# Altium PCB S7CAS-PLEIADES-CARTE-MERE_P06.PcbDoc (part 2 of 3)
Units mil, origin at the board's own origin, x right, y up, seen from the top; angles counter-clockwise.
Board outline 5000 x 5000 mil, 12 copper layers (Top Layer, GND1, SIG1, GND2, PWR1, GND3, GND4, PWR2, GND5, SIG2, GND6, Bottom), stack 47.089 mil thick; 447 components, 336 nets, 2150 pads, 232 vias.
Unrouted connection lines stored in the file: 1376.
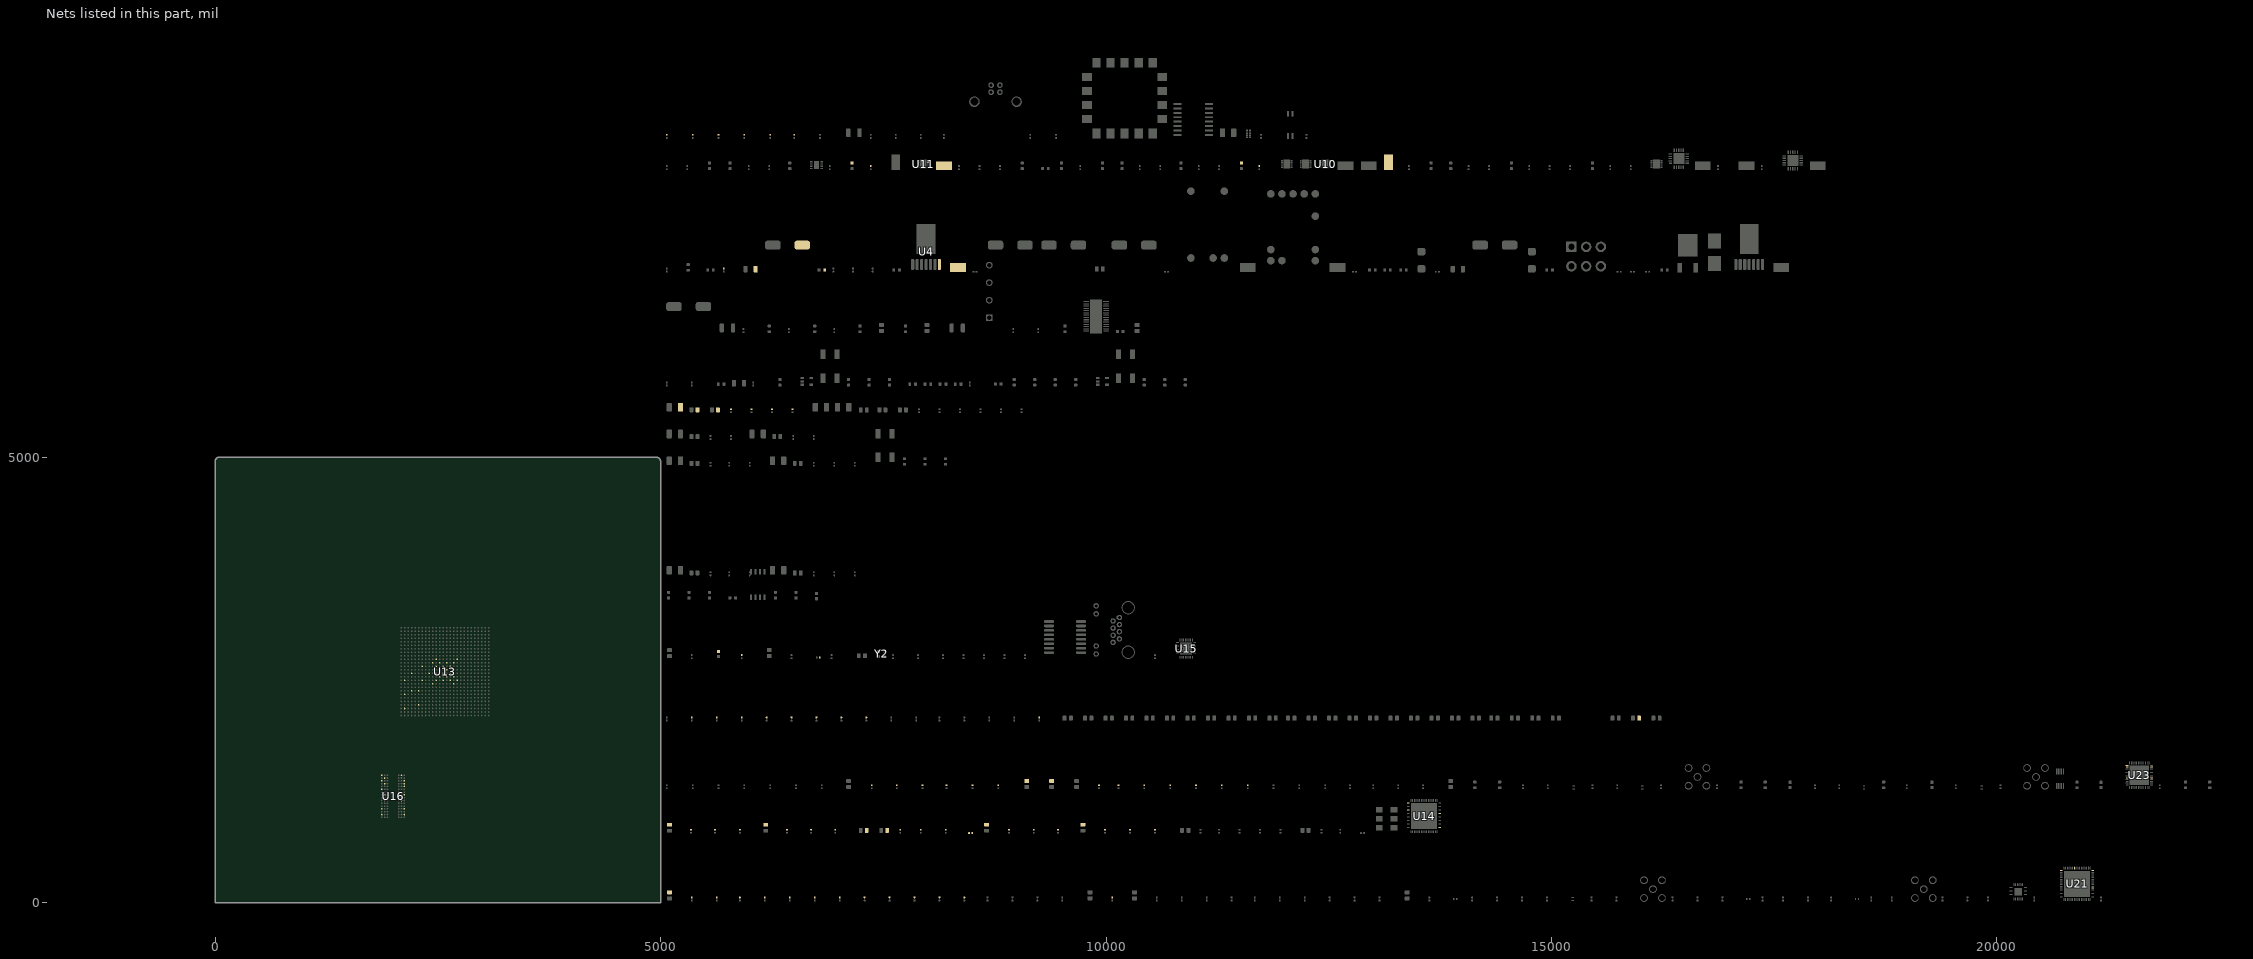
[diagram p10: the nets of this part, all layers, seen from the top]

## Footprints (in the part's own frame and the unit in brackets; to place one, negate y for a bottom-side part, rotate by r counter-clockwise, add the part's x,y. Pads: shape width x height; smd on the part's side, far side on the other; paste and mask are expansions set on the pad) (continued)
FPGA_XILINX_FGG676 [mm]
  round 0.45 smd mask+0.05: A1(-12.5,12.5) A2(-11.5,12.5) A3(-10.5,12.5) A4(-9.5,12.5) A5(-8.5,12.5) A6(-7.5,12.5) A7(-6.5,12.5) A8(-5.5,12.5) A9(-4.5,12.5) A10(-3.5,12.5) A11(-2.5,12.5) A12(-1.5,12.5) A13(-0.5,12.5) A14(0.5,12.5) A15(1.5,12.5) A16(2.5,12.5) A17(3.5,12.5) A18(4.5,12.5) A19(5.5,12.5) A20(6.5,12.5) A21(7.5,12.5) A22(8.5,12.5) A23(9.5,12.5) A24(10.5,12.5) A25(11.5,12.5) A26(12.5,12.5) AA1(-12.5,-7.5) AA2(-11.5,-7.5) AA3(-10.5,-7.5) AA4(-9.5,-7.5) AA5(-8.5,-7.5) AA6(-7.5,-7.5) AA7(-6.5,-7.5) AA8(-5.5,-7.5) AA9(-4.5,-7.5) AA10(-3.5,-7.5) AA11(-2.5,-7.5) AA12(-1.5,-7.5) AA13(-0.5,-7.5) AA14(0.5,-7.5) AA15(1.5,-7.5) AA16(2.5,-7.5) AA17(3.5,-7.5) AA18(4.5,-7.5) AA19(5.5,-7.5) AA20(6.5,-7.5) AA21(7.5,-7.5) AA22(8.5,-7.5) AA23(9.5,-7.5) AA24(10.5,-7.5) AA25(11.5,-7.5) AA26(12.5,-7.5) AB1(-12.5,-8.5) AB2(-11.5,-8.5) AB3(-10.5,-8.5) AB4(-9.5,-8.5) AB5(-8.5,-8.5) AB6(-7.5,-8.5) AB7(-6.5,-8.5) AB8(-5.5,-8.5) AB9(-4.5,-8.5) AB10(-3.5,-8.5) AB11(-2.5,-8.5) AB12(-1.5,-8.5) AB13(-0.5,-8.5) AB14(0.5,-8.5) AB15(1.5,-8.5) AB16(2.5,-8.5) AB17(3.5,-8.5) AB18(4.5,-8.5) AB19(5.5,-8.5) AB20(6.5,-8.5) AB21(7.5,-8.5) AB22(8.5,-8.5) AB23(9.5,-8.5) AB24(10.5,-8.5) AB25(11.5,-8.5) AB26(12.5,-8.5) AC1(-12.5,-9.5) AC2(-11.5,-9.5) AC3(-10.5,-9.5) AC4(-9.5,-9.5) AC5(-8.5,-9.5) AC6(-7.5,-9.5) AC7(-6.5,-9.5) AC8(-5.5,-9.5) AC9(-4.5,-9.5) AC10(-3.5,-9.5) AC11(-2.5,-9.5) AC12(-1.5,-9.5) AC13(-0.5,-9.5) AC14(0.5,-9.5) AC15(1.5,-9.5) AC16(2.5,-9.5) AC17(3.5,-9.5) AC18(4.5,-9.5) AC19(5.5,-9.5) AC20(6.5,-9.5) AC21(7.5,-9.5) AC22(8.5,-9.5) AC23(9.5,-9.5) AC24(10.5,-9.5) AC25(11.5,-9.5) AC26(12.5,-9.5) AD1(-12.5,-10.5) AD2(-11.5,-10.5) AD3(-10.5,-10.5) AD4(-9.5,-10.5) AD5(-8.5,-10.5) AD6(-7.5,-10.5) AD7(-6.5,-10.5) AD8(-5.5,-10.5) AD9(-4.5,-10.5) AD10(-3.5,-10.5) AD11(-2.5,-10.5) AD12(-1.5,-10.5) AD13(-0.5,-10.5) AD14(0.5,-10.5) AD15(1.5,-10.5) AD16(2.5,-10.5) AD17(3.5,-10.5) AD18(4.5,-10.5) AD19(5.5,-10.5) AD20(6.5,-10.5) AD21(7.5,-10.5) AD22(8.5,-10.5) AD23(9.5,-10.5) AD24(10.5,-10.5) AD25(11.5,-10.5) AD26(12.5,-10.5) AE1(-12.5,-11.5) AE2(-11.5,-11.5) AE3(-10.5,-11.5) AE4(-9.5,-11.5) AE5(-8.5,-11.5) AE6(-7.5,-11.5) AE7(-6.5,-11.5) AE8(-5.5,-11.5) AE9(-4.5,-11.5) AE10(-3.5,-11.5) AE11(-2.5,-11.5) AE12(-1.5,-11.5) AE13(-0.5,-11.5) AE14(0.5,-11.5) AE15(1.5,-11.5) AE16(2.5,-11.5) AE17(3.5,-11.5) AE18(4.5,-11.5) AE19(5.5,-11.5) AE20(6.5,-11.5) AE21(7.5,-11.5) AE22(8.5,-11.5) AE23(9.5,-11.5) AE24(10.5,-11.5) AE25(11.5,-11.5) AE26(12.5,-11.5) AF1(-12.5,-12.5) AF2(-11.5,-12.5) AF3(-10.5,-12.5) AF4(-9.5,-12.5) AF5(-8.5,-12.5) AF6(-7.5,-12.5) AF7(-6.5,-12.5) AF8(-5.5,-12.5) AF9(-4.5,-12.5) AF10(-3.5,-12.5) AF11(-2.5,-12.5) AF12(-1.5,-12.5) AF13(-0.5,-12.5) AF14(0.5,-12.5) AF15(1.5,-12.5) AF16(2.5,-12.5) AF17(3.5,-12.5) AF18(4.5,-12.5) AF19(5.5,-12.5) AF20(6.5,-12.5) AF21(7.5,-12.5) AF22(8.5,-12.5) AF23(9.5,-12.5) AF24(10.5,-12.5) AF25(11.5,-12.5) AF26(12.5,-12.5) B1(-12.5,11.5) B2(-11.5,11.5) B3(-10.5,11.5) B4(-9.5,11.5) B5(-8.5,11.5) B6(-7.5,11.5) B7(-6.5,11.5) B8(-5.5,11.5) B9(-4.5,11.5) B10(-3.5,11.5) B11(-2.5,11.5) B12(-1.5,11.5) B13(-0.5,11.5) B14(0.5,11.5) B15(1.5,11.5) B16(2.5,11.5) B17(3.5,11.5) B18(4.5,11.5) B19(5.5,11.5) B20(6.5,11.5) B21(7.5,11.5) B22(8.5,11.5) B23(9.5,11.5) B24(10.5,11.5) B25(11.5,11.5) B26(12.5,11.5) C1(-12.5,10.5) C2(-11.5,10.5) C3(-10.5,10.5) C4(-9.5,10.5) C5(-8.5,10.5) C6(-7.5,10.5) C7(-6.5,10.5) C8(-5.5,10.5) C9(-4.5,10.5) C10(-3.5,10.5) C11(-2.5,10.5) C12(-1.5,10.5) C13(-0.5,10.5) C14(0.5,10.5) C15(1.5,10.5) C16(2.5,10.5) C17(3.5,10.5) C18(4.5,10.5) C19(5.5,10.5) C20(6.5,10.5) C21(7.5,10.5) C22(8.5,10.5) C23(9.5,10.5) C24(10.5,10.5) C25(11.5,10.5) C26(12.5,10.5) D1(-12.5,9.5) D2(-11.5,9.5) D3(-10.5,9.5) D4(-9.5,9.5) D5(-8.5,9.5) D6(-7.5,9.5) D7(-6.5,9.5) D8(-5.5,9.5) D9(-4.5,9.5) D10(-3.5,9.5) D11(-2.5,9.5) D12(-1.5,9.5) D13(-0.5,9.5) D14(0.5,9.5) D15(1.5,9.5) D16(2.5,9.5) D17(3.5,9.5) D18(4.5,9.5) D19(5.5,9.5) D20(6.5,9.5) D21(7.5,9.5) D22(8.5,9.5) D23(9.5,9.5) D24(10.5,9.5) D25(11.5,9.5) D26(12.5,9.5) E1(-12.5,8.5) E2(-11.5,8.5) E3(-10.5,8.5) E4(-9.5,8.5) E5(-8.5,8.5) E6(-7.5,8.5) E7(-6.5,8.5) E8(-5.5,8.5) E9(-4.5,8.5) E10(-3.5,8.5) E11(-2.5,8.5) E12(-1.5,8.5) E13(-0.5,8.5) E14(0.5,8.5) E15(1.5,8.5) E16(2.5,8.5) E17(3.5,8.5) E18(4.5,8.5) E19(5.5,8.5) E20(6.5,8.5) E21(7.5,8.5) E22(8.5,8.5) E23(9.5,8.5) E24(10.5,8.5) E25(11.5,8.5) E26(12.5,8.5) F1(-12.5,7.5) F2(-11.5,7.5) F3(-10.5,7.5) F4(-9.5,7.5) F5(-8.5,7.5) F6(-7.5,7.5) F7(-6.5,7.5) F8(-5.5,7.5) F9(-4.5,7.5) F10(-3.5,7.5) F11(-2.5,7.5) F12(-1.5,7.5) F13(-0.5,7.5) F14(0.5,7.5) F15(1.5,7.5) F16(2.5,7.5) F17(3.5,7.5) F18(4.5,7.5) F19(5.5,7.5) F20(6.5,7.5) F21(7.5,7.5) F22(8.5,7.5) F23(9.5,7.5) F24(10.5,7.5) F25(11.5,7.5) F26(12.5,7.5) G1(-12.5,6.5) G2(-11.5,6.5) G3(-10.5,6.5) G4(-9.5,6.5) G5(-8.5,6.5) G6(-7.5,6.5) G7(-6.5,6.5) G8(-5.5,6.5) G9(-4.5,6.5) G10(-3.5,6.5) G11(-2.5,6.5) G12(-1.5,6.5) G13(-0.5,6.5) G14(0.5,6.5) G15(1.5,6.5) G16(2.5,6.5) G17(3.5,6.5) G18(4.5,6.5) G19(5.5,6.5) G20(6.5,6.5) G21(7.5,6.5) G22(8.5,6.5) G23(9.5,6.5) G24(10.5,6.5) G25(11.5,6.5) G26(12.5,6.5) H1(-12.5,5.5) H2(-11.5,5.5) H3(-10.5,5.5) H4(-9.5,5.5) H5(-8.5,5.5) H6(-7.5,5.5) H7(-6.5,5.5) H8(-5.5,5.5) H9(-4.5,5.5) H10(-3.5,5.5) H11(-2.5,5.5) H12(-1.5,5.5) H13(-0.5,5.5) H14(0.5,5.5) H15(1.5,5.5) H16(2.5,5.5) H17(3.5,5.5) H18(4.5,5.5) H19(5.5,5.5) H20(6.5,5.5) H21(7.5,5.5) H22(8.5,5.5) H23(9.5,5.5) H24(10.5,5.5) H25(11.5,5.5) H26(12.5,5.5) J1(-12.5,4.5) J2(-11.5,4.5) J3(-10.5,4.5) J4(-9.5,4.5) J5(-8.5,4.5) J6(-7.5,4.5) J7(-6.5,4.5) J8(-5.5,4.5) J9(-4.5,4.5) J10(-3.5,4.5) J11(-2.5,4.5) J12(-1.5,4.5) J13(-0.5,4.5) J14(0.5,4.5) J15(1.5,4.5) J16(2.5,4.5) J17(3.5,4.5) J18(4.5,4.5) J19(5.5,4.5) J20(6.5,4.5) J21(7.5,4.5) J22(8.5,4.5) J23(9.5,4.5) J24(10.5,4.5) J25(11.5,4.5) J26(12.5,4.5) K1(-12.5,3.5) K2(-11.5,3.5) K3(-10.5,3.5) K4(-9.5,3.5) K5(-8.5,3.5) K6(-7.5,3.5) K7(-6.5,3.5) K8(-5.5,3.5) K9(-4.5,3.5) K10(-3.5,3.5) K11(-2.5,3.5) K12(-1.5,3.5) K13(-0.5,3.5) K14(0.5,3.5) K15(1.5,3.5) K16(2.5,3.5) K17(3.5,3.5) K18(4.5,3.5) K19(5.5,3.5) K20(6.5,3.5) K21(7.5,3.5) K22(8.5,3.5) K23(9.5,3.5) K24(10.5,3.5) K25(11.5,3.5) K26(12.5,3.5) L1(-12.5,2.5) L2(-11.5,2.5) L3(-10.5,2.5) L4(-9.5,2.5) L5(-8.5,2.5) L6(-7.5,2.5) L7(-6.5,2.5) L8(-5.5,2.5) L9(-4.5,2.5) L10(-3.5,2.5) L11(-2.5,2.5) L12(-1.5,2.5) L13(-0.5,2.5) L14(0.5,2.5) L15(1.5,2.5) L16(2.5,2.5) L17(3.5,2.5) L18(4.5,2.5) L19(5.5,2.5) L20(6.5,2.5) L21(7.5,2.5) L22(8.5,2.5) L23(9.5,2.5) L24(10.5,2.5) L25(11.5,2.5) L26(12.5,2.5) M1(-12.5,1.5) M2(-11.5,1.5) M3(-10.5,1.5) M4(-9.5,1.5) M5(-8.5,1.5) M6(-7.5,1.5) M7(-6.5,1.5) M8(-5.5,1.5) M9(-4.5,1.5) M10(-3.5,1.5) M11(-2.5,1.5) M12(-1.5,1.5) M13(-0.5,1.5) M14(0.5,1.5) M15(1.5,1.5) M16(2.5,1.5) M17(3.5,1.5) M18(4.5,1.5) M19(5.5,1.5) M20(6.5,1.5) M21(7.5,1.5) M22(8.5,1.5) M23(9.5,1.5) M24(10.5,1.5) M25(11.5,1.5) M26(12.5,1.5) N1(-12.5,0.5) N2(-11.5,0.5) N3(-10.5,0.5) N4(-9.5,0.5) N5(-8.5,0.5) N6(-7.5,0.5) N7(-6.5,0.5) N8(-5.5,0.5) N9(-4.5,0.5) N10(-3.5,0.5) N11(-2.5,0.5) N12(-1.5,0.5) N13(-0.5,0.5) N14(0.5,0.5) N15(1.5,0.5) N16(2.5,0.5) N17(3.5,0.5) N18(4.5,0.5) N19(5.5,0.5) N20(6.5,0.5) N21(7.5,0.5) N22(8.5,0.5) N23(9.5,0.5) N24(10.5,0.5) N25(11.5,0.5) N26(12.5,0.5) P1(-12.5,-0.5) P2(-11.5,-0.5) P3(-10.5,-0.5) P4(-9.5,-0.5) P5(-8.5,-0.5) P6(-7.5,-0.5) P7(-6.5,-0.5) P8(-5.5,-0.5) P9(-4.5,-0.5) P10(-3.5,-0.5) P11(-2.5,-0.5) P12(-1.5,-0.5) P13(-0.5,-0.5) P14(0.5,-0.5) P15(1.5,-0.5) P16(2.5,-0.5) P17(3.5,-0.5) P18(4.5,-0.5) P19(5.5,-0.5) P20(6.5,-0.5) P21(7.5,-0.5) P22(8.5,-0.5) P23(9.5,-0.5) P24(10.5,-0.5) P25(11.5,-0.5) P26(12.5,-0.5) R1(-12.5,-1.5) R2(-11.5,-1.5) R3(-10.5,-1.5) R4(-9.5,-1.5) R5(-8.5,-1.5) R6(-7.5,-1.5) R7(-6.5,-1.5) R8(-5.5,-1.5) R9(-4.5,-1.5) R10(-3.5,-1.5) R11(-2.5,-1.5) R12(-1.5,-1.5) R13(-0.5,-1.5) R14(0.5,-1.5) R15(1.5,-1.5) R16(2.5,-1.5) R17(3.5,-1.5) R18(4.5,-1.5) R19(5.5,-1.5) R20(6.5,-1.5) R21(7.5,-1.5) R22(8.5,-1.5) R23(9.5,-1.5) R24(10.5,-1.5) R25(11.5,-1.5) R26(12.5,-1.5) T1(-12.5,-2.5) T2(-11.5,-2.5) T3(-10.5,-2.5) T4(-9.5,-2.5) T5(-8.5,-2.5) T6(-7.5,-2.5) T7(-6.5,-2.5) T8(-5.5,-2.5) T9(-4.5,-2.5) T10(-3.5,-2.5) T11(-2.5,-2.5) T12(-1.5,-2.5) T13(-0.5,-2.5) T14(0.5,-2.5) T15(1.5,-2.5) T16(2.5,-2.5) T17(3.5,-2.5) T18(4.5,-2.5) T19(5.5,-2.5) T20(6.5,-2.5) T21(7.5,-2.5) T22(8.5,-2.5) T23(9.5,-2.5) T24(10.5,-2.5) T25(11.5,-2.5) T26(12.5,-2.5) U1(-12.5,-3.5) U2(-11.5,-3.5) U3(-10.5,-3.5) U4(-9.5,-3.5) U5(-8.5,-3.5) U6(-7.5,-3.5) U7(-6.5,-3.5) U8(-5.5,-3.5) U9(-4.5,-3.5) U10(-3.5,-3.5) U11(-2.5,-3.5) U12(-1.5,-3.5) U13(-0.5,-3.5) U14(0.5,-3.5) U15(1.5,-3.5) U16(2.5,-3.5) U17(3.5,-3.5) U18(4.5,-3.5) U19(5.5,-3.5) U20(6.5,-3.5) U21(7.5,-3.5) U22(8.5,-3.5) U23(9.5,-3.5) U24(10.5,-3.5) U25(11.5,-3.5) U26(12.5,-3.5) V1(-12.5,-4.5) V2(-11.5,-4.5) V3(-10.5,-4.5) V4(-9.5,-4.5) V5(-8.5,-4.5) V6(-7.5,-4.5) V7(-6.5,-4.5) V8(-5.5,-4.5) V9(-4.5,-4.5) V10(-3.5,-4.5) V11(-2.5,-4.5) V12(-1.5,-4.5) V13(-0.5,-4.5) V14(0.5,-4.5) V15(1.5,-4.5) V16(2.5,-4.5) V17(3.5,-4.5) V18(4.5,-4.5) V19(5.5,-4.5) V20(6.5,-4.5) V21(7.5,-4.5) V22(8.5,-4.5) V23(9.5,-4.5) V24(10.5,-4.5) V25(11.5,-4.5) V26(12.5,-4.5) W1(-12.5,-5.5) W2(-11.5,-5.5) W3(-10.5,-5.5) W4(-9.5,-5.5) W5(-8.5,-5.5) W6(-7.5,-5.5) W7(-6.5,-5.5) W8(-5.5,-5.5) W9(-4.5,-5.5) W10(-3.5,-5.5) W11(-2.5,-5.5) W12(-1.5,-5.5) W13(-0.5,-5.5) W14(0.5,-5.5) W15(1.5,-5.5) W16(2.5,-5.5) W17(3.5,-5.5) W18(4.5,-5.5) W19(5.5,-5.5) W20(6.5,-5.5) W21(7.5,-5.5) W22(8.5,-5.5) W23(9.5,-5.5) W24(10.5,-5.5) W25(11.5,-5.5) W26(12.5,-5.5) Y1(-12.5,-6.5) Y2(-11.5,-6.5) Y3(-10.5,-6.5) Y4(-9.5,-6.5) Y5(-8.5,-6.5) Y6(-7.5,-6.5) Y7(-6.5,-6.5) Y8(-5.5,-6.5) Y9(-4.5,-6.5) Y10(-3.5,-6.5) Y11(-2.5,-6.5) Y12(-1.5,-6.5) Y13(-0.5,-6.5) Y14(0.5,-6.5) Y15(1.5,-6.5) Y16(2.5,-6.5) Y17(3.5,-6.5) Y18(4.5,-6.5) Y19(5.5,-6.5) Y20(6.5,-6.5) Y21(7.5,-6.5) Y22(8.5,-6.5) Y23(9.5,-6.5) Y24(10.5,-6.5) Y25(11.5,-6.5) Y26(12.5,-6.5)
  silkscreen extent -13.75,-13.5 13.5,13.75, body extent -13.5,-13.53 13.5,13.47, height 2.24
FUS_0154XXX.DR [mil]
  rect 167x150 smd paste+0 mask+4: 1(-125.39,0) 2(125.39,0)
  silkscreen extent -224,-106 224,106, body extent -191,-98 191,98, height 145
ISO_ADUM3160BRWZ-RL [mil]
  rect 90.51x22.01 smd paste-1.97 mask+2.76: 1(-178.25,175) 2(-178.25,125) 3(-178.25,75) 4(-178.25,25) 5(-178.25,-25) 6(-178.25,-75) 7(-178.25,-125) 8(-178.25,-175) 9(178.25,-175) 10(178.25,-125) 11(178.25,-75) 12(178.25,-25) 13(178.25,25) 14(178.25,75) 15(178.25,125) 16(178.25,175)
  silkscreen extent -185,-214 156,221, body extent -210,-206 209,206, height 104
LED_0603 [mm] "Light Emitting Diode - Package 1608"
  rrect50% 0.8x1 smd: A(-0.825,0) K(0.825,0)
  silkscreen extent -0.2,-0.67 0.2,0.67, body extent -0.81,-0.38 0.81,0.42, height 1.1
MEM_DDR3_MT41J128M16JT-125 [mm]
  round 0.45 smd: A1(-3.2,6) A2(-2.4,6) A3(-1.6,6) A7(1.6,6) A8(2.4,6) A9(3.2,6) B1(-3.2,5.2) B2(-2.4,5.2) B3(-1.6,5.2) B7(1.6,5.2) B8(2.4,5.2) B9(3.2,5.2) C1(-3.2,4.4) C2(-2.4,4.4) C3(-1.6,4.4) C7(1.6,4.4) C8(2.4,4.4) C9(3.2,4.4) D1(-3.2,3.6) D2(-2.4,3.6) D3(-1.6,3.6) D7(1.6,3.6) D8(2.4,3.6) D9(3.2,3.6) E1(-3.2,2.8) E2(-2.4,2.8) E3(-1.6,2.8) E7(1.6,2.8) E8(2.4,2.8) E9(3.2,2.8) F1(-3.2,2) F2(-2.4,2) F3(-1.6,2) F7(1.6,2) F8(2.4,2) F9(3.2,2) G1(-3.2,1.2) G2(-2.4,1.2) G3(-1.6,1.2) G7(1.6,1.2) G8(2.4,1.2) G9(3.2,1.2) H1(-3.2,0.4) H2(-2.4,0.4) H3(-1.6,0.4) H7(1.6,0.4) H8(2.4,0.4) H9(3.2,0.4) J1(-3.2,-0.4) J2(-2.4,-0.4) J3(-1.6,-0.4) J7(1.6,-0.4) J8(2.4,-0.4) J9(3.2,-0.4) K1(-3.2,-1.2) K2(-2.4,-1.2) K3(-1.6,-1.2) K7(1.6,-1.2) K8(2.4,-1.2) K9(3.2,-1.2) L1(-3.2,-2) L2(-2.4,-2) L3(-1.6,-2) L7(1.6,-2) L8(2.4,-2) L9(3.2,-2) M1(-3.2,-2.8) M2(-2.4,-2.8) M3(-1.6,-2.8) M7(1.6,-2.8) M8(2.4,-2.8) M9(3.2,-2.8) N1(-3.2,-3.6) N2(-2.4,-3.6) N3(-1.6,-3.6) N7(1.6,-3.6) N8(2.4,-3.6) N9(3.2,-3.6) P1(-3.2,-4.4) P2(-2.4,-4.4) P3(-1.6,-4.4) P7(1.6,-4.4) P8(2.4,-4.4) P9(3.2,-4.4) R1(-3.2,-5.2) R2(-2.4,-5.2) R3(-1.6,-5.2) R7(1.6,-5.2) R8(2.4,-5.2) R9(3.2,-5.2) T1(-3.2,-6) T2(-2.4,-6) T3(-1.6,-6) T7(1.6,-6) T8(2.4,-6) T9(3.2,-6)
  silkscreen extent -5.31,-6.98 4.5,7.01, body extent -4.5,-7 4.5,7, height 1.05
MOD_JTAG_410-357-B [mm]
  rect 2.3x2.8 smd paste-0.025 mask+0.07: 1(-8,-10.1) 2(-4,-10.1) 3(0,-10.1) 4(4,-10.1) 5(8,-10.1) 10(8,10.1) 11(4,10.1) 12(0,10.1) 13(-4,10.1) 14(-8,10.1)
  rect 2.8x2.3 smd paste-0.025 mask+0.07: 6(10.725,-6) 7(10.725,-2) 8(10.725,2) 9(10.725,6) 15(-10.725,6) 16(-10.725,2) 17(-10.725,-2) 18(-10.725,-6)
  silkscreen extent -11.57,-10.94 11.57,10.94, body extent -11.38,-10.75 11.38,10.75, height 2.5
OPAMP_AD8056ARMZ [mm] "SOP, 8-Leads, Body 3x3mm, Pitch 0.65mm, IPC Medium Density"
  oval 1.8x0.4 smd mask+0.07: 1(-2.075,0.975) 2(-2.075,0.325) 3(-2.075,-0.325) 4(-2.075,-0.975) 5(2.075,-0.975) 6(2.075,-0.325) 7(2.075,0.325) 8(2.075,0.975)
  silkscreen extent -2.2,-1.6 0.77,1.87, body extent -2.12,-1.53 2.07,1.52, height 1.3
OPAMP_ADA4927-2YCPZ-R2 [mm] "QFN, 24-Leads, Body 4,00x4,00mm, Pitch 0,50mm, Thermal Pad 2,10x2,10mm, IPC Low Density"
  oval 0.8x0.2 smd mask+0.075: 1(-2.05,1.25) 2(-2.05,0.75) 3(-2.05,0.25) 4(-2.05,-0.25) 5(-2.05,-0.75) 6(-2.05,-1.25) 13(2.05,-1.25) 14(2.05,-0.75) 15(2.05,-0.25) 16(2.05,0.25) 17(2.05,0.75) 18(2.05,1.25)
  oval 0.2x0.8 smd mask+0.075: 7(-1.25,-2.05) 8(-0.75,-2.05) 9(-0.25,-2.05) 10(0.25,-2.05) 11(0.75,-2.05) 12(1.25,-2.05) 19(1.25,2.05) 20(0.75,2.05) 21(0.25,2.05) 22(-0.25,2.05) 23(-0.75,2.05) 24(-1.25,2.05)
  rect 2.1x2.1 smd mask+0.075: PAD(0,0)
  silkscreen extent -2.92,-2.15 2.15,2.15, body extent -2,-2 2,2, height 1
OSC_590BD-BDG [mm]
  rect 1.95x1.55 smd paste-0.025 mask+0.07: 1(-2.1,2.54) 2(-2.1,0) 3(-2.1,-2.54) 4(2.1,-2.54) 5(2.1,0) 6(2.1,2.54)
  silkscreen extent -3.68,-3.81 2.54,3.81, body extent -2.54,-3.56 2.54,3.56, height 1.3
OSC_ASDMB-25.000MHZ-LC-T [mm]
  rrect50% 0.65x0.85 smd paste-0.025 mask+0.07: 1(-0.825,-0.775) 2(0.825,-0.775) 3(0.825,0.775) 4(-0.825,0.775)
  silkscreen extent -1.41,-1.56 1.35,1.1, body extent -1.25,-1 1.25,1, height 0.83
POW_MOTOR_DRV8811PWPR [mm] "TSOP, 28-Leads, Body 9,70x4,40mm, Pitch 0,65mm, Thermal Pad 9,70x3,40mm, IPC Medium Density"
  oval 1.6x0.3 smd: 1(-2.8,4.225) 2(-2.8,3.575) 3(-2.8,2.925) 4(-2.8,2.275) 5(-2.8,1.625) 6(-2.8,0.975) 7(-2.8,0.325) 8(-2.8,-0.325) 9(-2.8,-0.975) 10(-2.8,-1.625) 11(-2.8,-2.275) 12(-2.8,-2.925) 13(-2.8,-3.575) 14(-2.8,-4.225) 15(2.8,-4.225) 16(2.8,-3.575) 17(2.8,-2.925) 18(2.8,-2.275) 19(2.8,-1.625) 20(2.8,-0.975) 21(2.8,-0.325) 22(2.8,0.325) 23(2.8,0.975) 24(2.8,1.625) 25(2.8,2.275) 26(2.8,2.925) 27(2.8,3.575) 28(2.8,4.225)
  rect 3.4x9.7 smd paste-15 mask-15: PAD(0,0)
  silkscreen extent -2.92,4.8 -2.67,5.05, body extent -3.2,-4.9 3.2,4.9, height 1.2
REG_LDO_NCP59744MN1ADJTBG [mm]
  rect 0.55x0.3 smd paste-0.025 mask+0.04: 1(-1.375,1) 2(-1.375,0.5) 3(-1.375,0) 4(-1.375,-0.5) 5(-1.375,-1) 6(1.375,-1) 7(1.375,-0.5) 8(1.375,0) 9(1.375,0.5) 10(1.375,1)
  rect 1.9x2.64 smd paste-2.64 mask+0.03: 11(0,0)
  silkscreen extent -2.25,-1.65 1.65,1.65, body extent -1.5,-1.5 1.5,1.5, height 1
REG_LDO_TPS7A3301RGWR [mm]
  rrect50% 0.35x1 smd paste-0.025 mask+0.07: 1(-1.3,-2.4) 2(-0.65,-2.4) 3(0,-2.4) 4(0.65,-2.4) 5(1.3,-2.4) 11(1.3,2.4) 12(0.65,2.4) 13(0,2.4) 14(-0.65,2.4) 15(-1.3,2.4)
  rrect50% 0.95x0.3 smd paste-0.025 mask+0.07: 6(2.4,-1.3) 7(2.4,-0.65) 8(2.4,0) 9(2.4,0.65) 10(2.4,1.3) 16(-2.4,1.3) 17(-2.4,0.65) 18(-2.4,0) 19(-2.4,-0.65) 20(-2.4,-1.3)
  rect 3.15x3.15 smd paste-3.15 mask+0: 21(0,0)
  silkscreen extent -2.7,-3.14 2.7,2.7, body extent -2.51,-2.51 2.51,2.51, height 0.88
REG_SWR_LMZ23605TZE/NOPB [mm]
  rrect50% 0.89x3.06 smd paste+0 mask+0.07: 1(-3.81,-7.305) 2(-2.54,-7.305) 3(-1.27,-7.305) 4(0,-7.305) 5(1.27,-7.305) 6(2.54,-7.305) 7(3.81,-7.305)
  rect 5.35x8.54 smd paste-10 mask+0.07: 8(0,0)
  silkscreen extent -5.08,-7.53 5.08,5.08, body extent -5.11,-8.82 5.05,4.95, height 4.57
REG_SWR_PTH08T241WAZ [mil]
  round 85 smd paste+0 mask+2.76: 1(-375,250) 2(-375,125) 3(-375,-250) 4(-250,-250) 5(125,-250) 6(375,-250) 7(375,-125) 8(375,0) 9(375,125) 10(375,250) 11(-250,250)
  silkscreen extent -505,-330 455,330, body extent -455,-330 455,330, height 355
REG_SWR_PTN04050AAZT [mil]
  round 85 smd paste-2 mask+0: 1(-355,187) 2(-355,-63) 3(-355,-188) 5(395,187)
  round 85 smd paste-0.98 mask+0: 4(395,-188)
  silkscreen extent -513,-279 465,279, body extent -455,-268 455,268, height 335
REG_TPS7A4701RGWR [mm]
  rrect50% 1x0.35 smd paste-0.025 mask+0.07: 1(-2.4,1.3) 2(-2.4,0.65) 3(-2.4,0) 4(-2.4,-0.65) 5(-2.4,-1.3) 11(2.4,-1.3) 12(2.4,-0.65) 13(2.4,0) 14(2.4,0.65) 15(2.4,1.3)
  rrect50% 0.35x1 smd paste-0.025 mask+0.07: 6(-1.3,-2.4) 7(-0.65,-2.4) 8(0,-2.4) 9(0.65,-2.4) 10(1.3,-2.4) 16(1.3,2.4) 17(0.65,2.4) 18(0,2.4) 19(-0.65,2.4) 20(-1.3,2.4)
  rrect10% 3.15x3.15 smd paste-1.575 mask+0: E1(0,0)
  silkscreen extent -3.59,-3.1 3.1,3.1, body extent -2.62,-2.62 2.63,2.63, height 1
RES_0402 [mil]
  rrect60% 20x20 smd: 1(-17.5,0) 2(17.5,0)
  silkscreen extent -32,-15 32,15, body extent -23,-11 23,11, height 16
RES_0603 [mil]
  rrect39% 31x35 smd: 1(-31.5,0) 2(31.5,0)
  silkscreen extent -58,-28 58,28, body extent -33,-16 33,16, height 22
RES_0805 [mil]
  rrect37% 43x55 smd: 1(-35.5,0) 2(35.5,0)
  silkscreen extent -68,-40 68,40, body extent -45,-27 45,27, height 30
RES_1206 [mil]
  rrect34% 47x71 smd: 1(-57,0) 2(57,0)
  silkscreen extent -91,-45 91,45, body extent -66,-34 66,34, height 33
RES_1210 [mm]
  rrect50% 1.2x2.5 smd: 1(-1.6,0) 2(1.6,0)
  silkscreen extent -2.54,-1.78 2.54,1.78, body extent -1.6,-1.25 1.6,1.25, height 0.55
SEN_TEMP_TC74A0-3.3VCTTR [mm]
  rect 1.05x0.6 smd paste-0.05 mask+0.07: 1(-1.3,0.95) 2(-1.3,0) 3(-1.3,-0.95) 4(1.3,-0.95) 5(1.3,0.95)
  silkscreen extent -2.47,-1.5 0.48,1.5, body extent -1.6,-1.58 1.6,1.53, height 1.45
SOIC127P700X200-4N [mil]
  rrect25% 64x23.19 smd: 1(-125.68,25) 2(-125.68,-25) 3(125.68,-25) 4(125.68,25)
  silkscreen extent -134,-57 91,66, body extent -138,-53 138,53, height 79
SON50P300X300X80-11N [mm]
  rrect25% 0.76x0.27 smd: 1(-1.485,1) 2(-1.485,0.5) 3(-1.485,0) 4(-1.485,-0.5) 5(-1.485,-1) 6(1.485,-1) 7(1.485,-0.5) 8(1.485,0) 9(1.485,0.5) 10(1.485,1)
  rect 1.5x2.3 smd paste-2: 11(0,0)
  silkscreen extent -2.54,-1.55 1.55,1.55, body extent -1.55,-1.55 1.55,1.55, height 1
SOP8L_200MIL_6110-1406_MAC [mil]
  rect 59x22 smd paste+0 mask+0: 1(-144,75) 2(-144,25) 3(-144,-25) 4(-144,-75) 5(144,-75) 6(144,-25) 7(144,25) 8(144,75)
  silkscreen extent -111,-110 111,110, body extent -159,-105 159,105, height 85
SWI_TACT_B3SN-3012P [mm]
  rect 2.75x1.4 smd paste-0.025 mask+0.07: 1(-3.375,2) 2(3.375,2) 3(-3.375,-2) 4(3.375,-2)
  silkscreen extent -5.9,-3.3 5.1,3.3, body extent -3.05,-3.05 3.05,3.05, height 3.2
TIM_CDCE62005RGZT [mm] "QFN, 64-Leads, Body 9,00x9,00mm, Pitch 0,50mm, Thermal Pad 7,40x7,40mm, IPC Medium Density"
  oval 0.8x0.23 smd mask+0.07: 1(-4.475,3.75) 2(-4.475,3.25) 3(-4.475,2.75) 4(-4.475,2.25) 5(-4.475,1.75) 6(-4.475,1.25) 7(-4.475,0.75) 8(-4.475,0.25) 9(-4.475,-0.25) 10(-4.475,-0.75) 11(-4.475,-1.25) 12(-4.475,-1.75) 13(-4.475,-2.25) 14(-4.475,-2.75) 15(-4.475,-3.25) 16(-4.475,-3.75) 33(4.475,-3.75) 34(4.475,-3.25) 35(4.475,-2.75) 36(4.475,-2.25) 37(4.475,-1.75) 38(4.475,-1.25) 39(4.475,-0.75) 40(4.475,-0.25) 41(4.475,0.25) 42(4.475,0.75) 43(4.475,1.25) 44(4.475,1.75) 45(4.475,2.25) 46(4.475,2.75) 47(4.475,3.25) 48(4.475,3.75)
  oval 0.23x0.8 smd mask+0.07: 17(-3.75,-4.475) 18(-3.25,-4.475) 19(-2.75,-4.475) 20(-2.25,-4.475) 21(-1.75,-4.475) 22(-1.25,-4.475) 23(-0.75,-4.475) 24(-0.25,-4.475) 25(0.25,-4.475) 26(0.75,-4.475) 27(1.25,-4.475) 28(1.75,-4.475) 29(2.25,-4.475) 30(2.75,-4.475) 31(3.25,-4.475) 32(3.75,-4.475) 49(3.75,4.475) 50(3.25,4.475) 51(2.75,4.475) 52(2.25,4.475) 53(1.75,4.475) 54(1.25,4.475) 55(0.75,4.475) 56(0.25,4.475) 57(-0.25,4.475) 58(-0.75,4.475) 59(-1.25,4.475) 60(-1.75,4.475) 61(-2.25,4.475) 62(-2.75,4.475) 63(-3.25,4.475) 64(-3.75,4.475)
  rect 7.4x7.4 smd mask+0.07: PAD(0,0)
  silkscreen extent -5.5,-4.72 4.72,4.72, body extent -4.57,-4.57 4.57,4.57, height 1
TPO_SMD_5019 [mm]
  rect 4.5x2.53 smd paste-5 mask+0.07: 1(0,0)
  silkscreen extent -2.54,-1.52 2.54,1.52, body extent -1.9,-1.01 1.91,1.02, height 2.29
TRANSFO_H1102NLT [mil]
  oval 115x30 smd: 1(-180,175) 2(-180,125) 3(-180,75) 4(-180,25) 5(-180,-25) 6(-180,-75) 7(-180,-125) 8(-180,-175) 9(180,-175) 10(180,-125) 11(180,-75) 12(180,-25) 13(180,25) 14(180,75) 15(180,125) 16(180,175)
  silkscreen extent -230,-248 110,248, body extent -175,-252 175,252, height 215
TVS_DATA_TPD4E05U06 [mm]
  rect 0.55x0.3 smd paste+0 mask+0.05: 1(-0.385,1) 2(-0.385,0.5) 4(-0.385,-0.5) 5(-0.385,-1) 6(0.385,-1) 7(0.385,-0.5) 9(0.385,0.5) 10(0.385,1)
  rect 0.55x0.4 smd paste+0 mask+0.05: 3(-0.385,0) 8(0.385,0)
  silkscreen extent -0.89,-1.45 0.55,1.45, body extent -0.55,-1.3 0.55,1.3, height 0.55
TVS_PWR_SMBJ5.0CA [mm]
  rrect50% 2.16x2.26 smd paste-0.025 mask+0.07: 1(-2.45,0) 2(2.45,0)
  silkscreen extent -2.5,-2.1 2.5,2.1, body extent -2.6,-1.97 2.6,1.97, height 2.61
TVS_PWR_SMBJ36CA [mm]
  rrect50% 2.16x2.26 smd paste+0 mask+0.102: 1(-2.45,0) 2(2.45,0)
  silkscreen extent -2.5,-2.1 2.5,2.1, body extent -2.6,-1.97 2.6,1.97, height 2.61

## Part data
C1 C2 C3 C4 C7 C12 C15 C18 C19 C20 C21 C22 C23 C24 C25 C26 C27 C28 C29 C30 C31 C32 C33 C34 C35 C36 C37 C38 C39 C40 C41 C42 C43 C91 C93 C94 C95 C96 C122 C123 C126 C128 C130 C131 C132 C133 C134 C135 C136 C137 C138 C139 C140 C141 C142 C143 C144 C145 C146 C152 C153 C156 C157 C158 C161 C162 C163 C165: Package=0402, Voltage=50V, CreatedBy="Jonathan Bouchard", Precision=10%
C5 C16: Package=1206, Voltage=6.3V, CreatedBy="Jonathan Bouchard", Precision=10%
C6 C8 C10 C17: library part CAP_ALU_MAL214699501E3, "CAP - ALU 330uF 20% 16V - 1010", Current=750mA, Package=1010, Supplier Part Number 1=4405PHCT-ND, Temperature="-55°C to 125°C", Voltage=16V, CreatedBy="Jonathan Bouchard", HelpURL=http://www.vishay.com/docs/28403/146cti.pdf, Mfg="Vishay Dale", Mfg Part Number=MAL214699501E3, Precision=20%, Supplier 1=Digikey
C9 C90 C97 C127 C129 C151 C154 C155: Package=0805, Voltage=50V, CreatedBy="Jonathan Bouchard", Precision=10%
C11 C159: library part CAP_ALU_MAL215099101E3, "CAP - ALU 100uF 20% 50V - 1010", Current=490mA, Package=1010, Supplier Part Number 1=4399PHDKR-ND, Temperature="-55°C to 125°C", Voltage=50V, CreatedBy="Jonathan Bouchard", HelpURL=http://www.vishay.com/docs/28395/150crz.pdf, Mfg="Vishay Dale", Mfg Part Number=MAL215099101E3, Precision=20%, Supplier 1=Digikey
C13 C14 C92 C99 C100 C101 C104 C105 C106 C109 C110 C111 C114 C115 C116 C119 C120 C121 C168 C169 C170 C171 C172 C173 C174 C175 C176 C177 C180 C181 C182 C183 C184 C185 C186 C187 C188 C189 C190 C191 C192 C193 C194 C195 C202 C203 C204 C205 C206 C207 C208 C209 C210 C211 C212 C213 C214 C219 C220 C221 C222 C223 C224 C225 C226 C227 C228 C229 C230 C231: Package=0402, Voltage=10V, CreatedBy="Jonathan Bouchard", Precision=10%
C44 C49 C54 C59 C64 C68 C72 C79 C80: Package=1210, Voltage=6.3V, CreatedBy="Jonathan Bouchard", Precision=10%
C45 C50 C55 C60 C65 C69 C73 C74 C81 C82 C83: Package=0805, Voltage=6.3V, CreatedBy="Jonathan Bouchard", Precision=10%
C46 C47 C48 C51 C52 C53 C56 C57 C58 C61 C62 C63 C66 C67 C70 C71 C75 C76 C77 C78 C84 C85 C86 C87 C88 C89: Package=0402, Voltage=6.3V, CreatedBy="Jonathan Bouchard", Precision=10%
C98 C103 C108 C113 C118 C167 C178 C179 C196 C215 C216 C217 C218 C232: Package=0805, Voltage=10V, CreatedBy="Jonathan Bouchard", Precision=10%
C102 C125 C197 C199 C200: Package=0603, Voltage=50V, CreatedBy="Jonathan Bouchard", Precision=10%
C124 C236: Package=1206, Voltage=2.5kV, CreatedBy="Jonathan Bouchard", Precision=10%
C147 C148 C149 C150: Package=0402, Voltage=35V, CreatedBy="Jonathan Bouchard", Precision=10%
C164 C166 C198 C201: Mfg Part Number=GCM1555C1H102FA16D, Package=0402, Voltage=50V, CreatedBy="Jonathan Bouchard", Precision=1%
C233: Package=1210, Voltage=35V, CreatedBy="Jonathan Bouchard", Precision=10%
C234 C235 C237 C238 C239 C240 C241 C242: Package=0402, Voltage=16V, CreatedBy="Jonathan Bouchard", Precision=10%
D1: library part CMP-07173-000088-1, "MOSFET P-CH 40V 10.8A DPAK", Continuous Drain Current=-10.8A, Drain To Source Breakdown Voltage=-40V, Drain To Source Resistance=10.1mΩ, Gate To Source Voltage=20V, Input Capacitace At Vds="2085pF @ -20V", Manufacturer="ON Semiconductor", Max Forward Diode Voltage=-1.2V, Max Junction Temp=+150°C, Package=369AS, Power Dissipation=2.4W, Pulse Drain Current=-100A, Temperature="-55°C to +150°C", Temperature Range Low=-55°C, Typ Forward Diode Voltage=-0.8V, Automotive=No, Category=Diode, ComponentLink2Description=Datasheet, ComponentLink2URL=https://www.onsemi.com/pub/Collateral/FDD4141-D.pdf, Depletion Mode=False, Device Class L1="Discrete Semiconductors", Device Class L2=Transistors, Device Class L3=MOSFETs, Digikey Description="MOSFET P-CH 40V 10.8A DPAK", Drain To Source Voltage=-40V, Footprint Url=https://www.onsemi.com/pub/Collateral/369AS.PDF, Gate Charge At Vgs="36nC @ -10V", Height=2.517mm, Lead Free=Yes, Manufacturer Part Number=FDD4141, Mouser Description="MOSFET -40V P-Channel PowerTrench", Number Of Channels=1, Number Of P Channels=1, Octopart=https://octopart.com/fdd4141-on+semiconductor-84325802, Reverse Recovery Charge=26nC, Reverse Recovery Time=29ns, RoHS=TRUE, Rthja Max=52°C/W, Temperature Range High=+150°C, Threshold Vgs Max=-3V, Threshold Vgs Min=-1V, Transconductance=38S, Turn Off Delay Time=38ns, Turn On Delay Time=10ns
D2: library part TVS_PWR_SMBJ5.0CA, "TVS - BIDIR 5V 9.2V 600W - DO214AA", Current Rating="65.3 A (Ipp)", Manufacturer #1="Littelfuse Inc.", Package=DO214AA, Power Max="600W (Pppm)", Supplier Part Number 1=SMBJ5.0CALFCT-ND, Temperature="-65°C ~ 150°C (TJ)", Voltage Rating="5V Standoff", Assembly Type=SMD, CreatedBy/Date="Jonathan Bouchard - 2019-03-22", Cryo=UNKNOWN, GRAMS Lib Spec=2.8, HelpURL=http://www.littelfuse.com/~/media/electronics/datasheets/tvs_diodes/littelfuse_tvs_diode_smbj_datasheet.pdf.pdf, Magnetic Material=UNKNOWN, Part Number #1=SMBJ5.0CA, Polarized=NO, Supplier 1=Digi-Key, VerifiedBy="Nicolas V. (2019-05-06)"
D3: library part TVS_PWR_SMBJ24CA, "TVS - 24V 26.7V 600W - DO214AA", Current Rating=15.5A, Manufacturer #1="Littelfuse Inc.", Package=DO214AA, Power Max=600W, Supplier Part Number 1=SMBJ24CALFCT-ND, Temperature="-65°C ~ 150°C (TJ)", Voltage Rating="24V Standoff", Assembly Type=SMD, CreatedBy/Date="Arnaud Samson - 06/07/18", Cryo=UNKNOWN, GRAMS Lib Spec=2.8, HelpURL=http://www.littelfuse.com/~/media/electronics/datasheets/tvs_diodes/littelfuse_tvs_diode_smbj_datasheet.pdf.pdf, Magnetic Material=UNKNOWN, Part Number #1=SMBJ24CA, Polarized=NO, Supplier 1=Digi-Key, VerifiedBy="Jonathan Bouchard - 2018-07-13"
D4 D5 D6 D7: library part LED_SML-311UTT86, "LED - 620nM RED 2mA - 0603", Current=2mA, Package=0603, Power=44mW, Supplier Part Number 1=511-1304-1-ND, Temperature="-30°C to 85°C", Voltage=1.8V, CreatedBy="Jonathan Bouchard", HelpURL=http://media.digikey.com/pdf/Data%20Sheets/Rohm%20PDFs/SML-311%20Series.pdf, Mfg="ROHM Semiconductor", Mfg Part Number=SML-311UTT86, Supplier 1=Digikey
D8: library part LED_SML-311DTT86, "LED - 611nM ORANGE 2mA - 0603", Current=2mA, Package=0603, Power=44mW, Supplier Part Number 1=511-1303-1-ND, Temperature="-40°C to 85°C", Voltage=1.8V, CreatedBy="Jonathan Bouchard", HelpURL=http://media.digikey.com/pdf/Data%20Sheets/Rohm%20PDFs/SML-311%20Series.pdf, Mfg="ROHM Semiconductor", Mfg Part Number=SML-311DTT86, Supplier 1=Digikey
D9: library part TVS_DATA_TPD4E05U06, "TVS - TVS DIODE 5.5VWM 14VC - 10SON", Current Rating="2.5A (8/20µs)", Manufacturer #1="Texas Instruments", Package=10-USON, Part Number #1=TPD4E05U06DQAR, Power Max="40 W (peak)", Supplier Part Number 1=296-35765-1-ND, Temperature="-40°C ~ 125°C", Voltage Rating="6V (Breakdown)", Assembly Type=SMD, CreatedBy/Date="Olivier Bernard / 12/3/2018", Cryo=UNKNOWN, GRAMS Lib Spec=2.8, HelpURL=http://www.ti.com/lit/ds/symlink/tpd4e05u06.pdf, Magnetic Material=UNKNOWN, Polarized=YES, Supplier 1=Digi-Key, VerifiedBy="Caroline Paulin / 4 juillet 2018"
F1: library part FUS_0154005.DR, "FUS - 5 A 125 VAC/VDC - 2-SMD", Current Rating=5A, Manufacturer #1="Littelfuse Inc.", Package=2-SMD, Supplier Part Number 1=F1228CT-ND, Temperature="-55°C ~ 125°C", Voltage Rating=125V, Assembly Type=SMD, CreatedBy/Date="Arnaud Samson - 06/07/18", Cryo=UNKNOWN, GRAMS Lib Spec=2.8, HelpURL=http://www.littelfuse.com/~/media/electronics/datasheets/fuses/littelfuse_fuse_154_154t_154l_154tl_datasheet.pdf.pdf, Magnetic Material=UNKNOWN, Part Number #1=0154005.DR, Polarized=NO, Supplier 1=Digi-Key, VerifiedBy="Jonathan Bouchard 2018-07-16"
ISO1: library part ISO_ADUM3160BRWZ-RL, "ISO - DGTL ISO 2.5KV 2CH USB - 16SOIC", Manufacturer #1="Analog Devices", Package=16-SOIC, Supplier Part Number 1=ADUM3160BRWZ-RLCT-ND, Temperature="-40°C ~ 105°C", Voltage Rating=3~5.5V, Assembly Type=SMD, CreatedBy/Date="Tommy Rossignol 2018-11-16", Cryo=UNKNOWN, GRAMS Lib Spec=2.8, HelpURL=https://www.analog.com/media/en/technical-documentation/data-sheets/ADuM3160.pdf, Magnetic Material=UNKNOWN, Part Number #1=ADUM3160BRWZ-RL, Polarized=Yes, Supplier 1=Digi-Key, VerifiedBy="Caroline Paulin - 13 février 2019"
J1: library part CON_MINIFIT_0039300060, "CON - Mini-Fit Through Hole, Right Angle 6 position", Current Rating=8A, Manufacturer #1=Molex, Package=TH, Supplier Part Number 1=WM21353-ND, Temperature="- 40°C to + 80°C", Voltage Rating=600V, Assembly Type=TH, CreatedBy/Date="Joel Lemay 2018-06-21", Cryo=UNKNOWN, GRAMS Lib Spec=2.8, HelpURL=https://www.molex.com/pdm_docs/sd/039300060_sd.pdf, Magnetic Material=Unknown, Part Number #1=0039300060, Polarized=Yes, Supplier 1=Digi-Key, VerifiedBy="Caroline Paulin - 10 sept 2018"
J2: library part CONN_ETHERNET_RJHSE-5385, "CONN - MOD JACK RJ45 R/A ETHERNET - TH", Package=TH-12, Supplier Part Number 1=RJHSE-5385-ND, Temperature="-55°C ~ 85°C", CreatedBy="Jonathan Bouchard", HelpURL=https://www.amphenolcanada.com/ProductSearch/drawings/AC/RJHSE538X.pdf, Mfg=Amphenol, Mfg Part Number=RJHSE-5385, Supplier 1=Digikey
J3: library part CONN_TERMINAL_OSTTC040162, "CONN -  TERMINAL BLOCK 4POS 5MM - TH", Package=TH-4, Supplier Part Number 1=ED2602-ND, Temperature="-30°C ~ 105°C", CreatedBy="Jonathan Bouchard", HelpURL=http://www.on-shore.com/wp-content/uploads/2015/09/osttcxx0162.pdf, Mfg="On Shore Technology Inc.", Mfg Part Number=OSTTC040162, Supplier 1=Digikey
J4 J5 J6 J7: library part CONN_SMA_5-1814400-1, "CONN -  SMA JACK R/A 50 OHM - TH", Package=TH-5, Supplier Part Number 1=A97593-ND, Temperature="-55°C ~ 85°C", CreatedBy="Jonathan Bouchard", HelpURL=http://www.te.com/commerce/DocumentDelivery/DDEController?Action=srchrtrv&DocNm=1814400&DocType=Customer+Drawing&DocLang=English, Mfg="TE Connectivity AMP Connectors", Mfg Part Number=5-1814400-1, Supplier 1=Digikey
J8: library part CON_USB_USB-B-S-F-B-TH, "CON - USB B RECPT TH R/A - 4-TH", Manufacturer #1="Samtec Inc.", Package=4-TH, Supplier Part Number 1=SAM10867-ND, Temperature="-50°C ~ 85°C", Voltage Rating=30VAC, Assembly Type=TH, CreatedBy/Date="Jonathan Bouchard 2020-03-24", Cryo=UNKNOWN, GRAMS Lib Spec=2.8c, HelpURL=http://suddendocs.samtec.com/catalog_english/usb_b.pdf, Magnetic Material=UNKNOWN, Part Number #1=USB-B-S-F-B-TH, Polarized=YES, Supplier 1=Digi-Key, VerifiedBy="C.Paulin - 22/04/2020"
L1 L2 L7 L12 L17: Current=1A, Package=0402, CreatedBy="Jonathan Bouchard"
L8 L9 L10 L11 L13 L14 L15 L16: library part CMP-06042-006317-1, "Wire Wound RF Inductor for Automotive 5.1nH ±0.2nH 800mA 0.051Ω 0402 (1005)"
M1: library part MOD_JTAG_410-357-B, "MOD - JTAG-SMT3-NC Programming Module For Xilinx FPGA - 18-SMT", Manufacturer #1=Digilent, Package="18-pad SMT", Supplier Part Number 1=1286-1196-ND, Temperature="-40°C ~ 85°C", Voltage Rating="VDD: 2.97V~3.63V, VJTAG/VUART: 1.65V~5.5V", Assembly Type=SMD, CreatedBy/Date="Tommy Rossignol 2018-11-23", Cryo=UNKNOWN, GRAMS Lib Spec=2.8, HelpURL=https://reference.digilentinc.com/_media/reference/programmers/jtag-smt3/jtag-smt3-nc_rm.pdf, Magnetic Material=Unknown, Note="Prior to reflow, the JTAG-SMT3-NC module must be dried at 125°C for 17 hours", Part Number #1=410-357-B, Polarized=Yes, Supplier 1=Digi-Key, VerifiedBy="Nicolas V. (2019-01-28)"
R1 R2 R3 R4 R5 R8 R9 R10 R11 R12 R13 R14 R15 R16 R17 R18 R19 R20 R21 R22 R23 R24 R25 R26 R28 R29 R30 R68 R69 R70 R71 R72 R73 R74 R75 R76 R77 R78 R79 R81 R82 R84 R85 R86 R87 R89 R90 R91 R92 R93 R94 R110 R111 R113 R116 R119 R120 R126 R127: Package=0603, CreatedBy="Jonathan Bouchard", Precision=1%
R6 R7 R31 R33 R34 R35 R36 R37 R38 R95 R96 R97 R98 R99 R100 R101 R102 R103 R104 R105 R106 R107 R108 R109 R112 R114 R115 R117 R118 R121 R122 R123 R124 R125 R128 R129 R130 R131 R132 R133: Package=0402, Power=1/16W, Voltage=50V, CreatedBy="Jonathan Bouchard"
  R6 R7: Precision=0.1%
  R31 R33 R34 R35 R36 R37 R38 R95 R96 R97 R98 R99 R100 R101 R102 R103 R104 R105 R106 R107 R108 R109 R112 R114 R115 R117 R118 R121 R122 R123 R124 R125 R128 R129 R130 R131 R132 R133: Precision=1%
R32 R39 R40 R41 R42 R43 R44 R45 R46 R47 R48 R49 R50 R51 R52 R53 R54 R55 R56 R57 R58 R59 R60 R61 R62 R63 R64 R65 R66 R67: Package=0805, CreatedBy="Jonathan Bouchard", Precision=1%
R80: Package=1206, Power=0.4W, CreatedBy="Jonathan Bouchard", Precision=1%
R83 R88: Package=1210, Power=1W, CreatedBy="Jonathan Bouchard", Precision=1%
R134: Package=1210, Power=1/16W, CreatedBy="Jonathan Bouchard", Precision=1%
S1 S2: library part SWI_TACT_B3SN-3012P_1, "SWI - SWITCH TACTILE SPST-NO 0.05A 24V -SMD", Current Rating=50mA, Manufacturer #1="Omron Electronics Inc-EMC Div", Package=SMD, Supplier Part Number 1=SW261CT-ND, Temperature="-25°C ~ 70°C", Voltage Rating=24VDC, Assembly Type=SMD, CreatedBy/Date="Olivier Bernard / 5/12/2017", Cryo=UNKNOWN, GRAMS Lib Spec=2.8, HelpURL=http://omronfs.omron.com/en_US/ecb/products/pdf/en-b3sn.pdf, Magnetic Material=UNKNOWN, Part Number #1=B3SN-3012P, Polarized=No, Supplier 1=Digi-Key, VerifiedBy="Caroline Paulin / 11 juillet 2018"
SW1: library part SWI_TACT_B3SN-3012P, "SWI - TACT SPST-NO 0.05A 24V - 4-SMD", Current=50mA, Package=4-SMD, Supplier Part Number 1=SW261CT-ND, Temperature="-25°C ~ 70°C", Voltage=24V, CreatedBy="Jonathan Bouchard", HelpURL=http://www.omron.com/ecb/products/pdf/en-b3sn.pdf, Mfg=Omron, Mfg Part Number=B3SN-3012P, Supplier 1=Digikey
T1: library part TRANSFO_H1102NLT, "TRANSFO - ETHERNET 10/100B-TX - SMD-16", Package=SMD-16, Supplier Part Number 1=553-1532-1-ND, Temperature="-40°C to 85°C", CreatedBy="Jonathan Bouchard", HelpURL=http://media.digikey.com/pdf/Data%20Sheets/Pulse%20PDFs/10_100BASE-T%20Single%20Port%20SMD%20Magnetics_Rev2008.pdf, Mfg="Pulse Eng.", Mfg Part Number=H1102NLT, Supplier 1=Digikey
TP1 TP2 TP3 TP4 TP5 TP6 TP7 TP8 TP9 TP10 TP11 TP12: library part TPO_SMD_5019, "TPO - PC TEST POINT MINI - SMD", Manufacturer #1="Keystone Electronics", Package=SMD, Supplier Part Number 1=36-5019CT-ND, Assembly Type=SMD, CreatedBy/Date="Olivier Bernard / 5/12/2017", Cryo=UNKNOWN, GRAMS Lib Spec=2.8, HelpURL=https://www.digikey.ca/product-detail/en/keystone-electronics/5019/36-5019CT-ND/3907344, Magnetic Material=UNKNOWN, Part Number #1=5019, Polarized=No, Supplier 1=Digi-Key, VerifiedBy="Caroline Paulin / 5 juillet 2018"
U1 U4: library part REG_SWR_LMZ23605TZE/NOPB, "REG - IC BUCK SYNC 36V 5A - TO-PMOD-7", Current Rating=5A, Manufacturer #1="Texas Instruments", Package=TO-PMOD-7, Supplier Part Number 1=296-35357-1-ND, Temperature="-40°C ~ 125°C", Voltage Rating="6 ~ 36 V", Assembly Type=SMD, CreatedBy/Date="Arnaud Samson - 05/07/18", Cryo=UNKNOWN, GRAMS Lib Spec=2.8, HelpURL=http://www.ti.com/lit/ds/symlink/lmz23605.pdf, Magnetic Material=YES, Note="One Reflow", Part Number #1=LMZ23605TZE/NOPB, Polarized=YES, Supplier 1=Digi-Key, VerifiedBy="Jonathan Bouchard 2018-07-13"
U2: library part REG_SWR_PTH08T241WAZ, "REG - MODULE PIP 10A 14VIN - 11-SMD", Current Rating="10A (out)", Manufacturer #1="Texas Instruments", Package=SMD, Supplier Part Number 1=296-21339-ND, Temperature="-40°C ~ 85°C", Voltage Rating="4.5-14V (Input), 0.69 - 5.5V (Out)", Assembly Type=SMD, CreatedBy/Date="Olivier Bernard / 6/5/2018", Cryo=UNKNOWN, HelpURL=http://www.ti.com/lit/ds/symlink/pth08t241w.pdf, Magnetic Material=UNKNOWN, Part Number #1=PTH08T241WAZ, Polarized=Yes, Supplier 1=Digi-Key, VerifiedBy="Caroline Paulin / 10 juillet 2018"
U3: library part REG_SWR_PTN04050AAZT, "REG - SWR -15 ~ -3.3V 1A 6W - 5-SMD", Current Rating=1A, Manufacturer #1="Texas Instruments", Package=5-SMD, Power Max=6W, Supplier Part Number 1=296-32208-1-ND, Temperature="-40°C ~ 85°C", Voltage Rating=2.9V~7Vin, Assembly Type=5-SMD, CreatedBy/Date="Ihsane Najahi 2019-09-25", Cryo=UNKNOWN, GRAMS Lib Spec=2.8, HelpURL=http://www.ti.com/lit/ds/symlink/ptn04050a.pdf, Magnetic Material=Unknown, Part Number #1=PTN04050AAZT, Polarized=Yes, Supplier 1=Digi-Key, VerifiedBy="C.Paulin (9-10-2019)"
U5: library part REG_LDO_TPS7A4701RGWR, "REG - LINEAR POS ADJ 1A - 20VQFN", Current Rating=1A, Manufacturer #1="Texas Instruments", Manufacturer #2=TBD, Package="20-VQFN Exposed Pad", Supplier Part Number 1=296-37224-1-ND, Temperature="-40°C ~ 125°C", Tolerance=-, Voltage Rating="35V max", Assembly Type=SMD, CreatedBy/Date="L-P Gauthier / 2018-05-29", Cryo=UNKNOWN, GRAMS Lib Spec=2.8, HelpURL=http://www.ti.com/lit/ds/symlink/tps7a47.pdf, Magnetic Material=Unknown, Part Number #1=TPS7A4701RGWR, Part Number #2=TBD, Polarized=Yes, Supplier 1=Digi-Key, VerifiedBy="Caroline Paulin - 28 sept 2018"
U6: library part REG_LDO_TPS7A3301RGWR, "REG - LDO Negative Adjustable 1 Output -1.18V-33V 1A -  20-VQFN (5x5)", Current Rating=1A, Manufacturer #1="Texas Instruments", Package=20-VQFN, Supplier Part Number 1=296-39502-1-ND, Temperature="-40°C ~ 125°C", Voltage Rating=-36V, Assembly Type=SMD, CreatedBy/Date="Keven Deslandes - 2018/10/11", Cryo=UNKNOWN, GRAMS Lib Spec=2.8, HelpURL=http://www.ti.com/lit/ds/symlink/tps7a33.pdf, Magnetic Material=Unknown, Part Number #1=TPS7A3301RGWR, Polarized=Yes, Supplier 1=Digi-Key, VerifiedBy="Caroline Paulin - 11/12/2018"
U7 U8 U9 U10 U11: library part REG_LDO_NCP59744MN1ADJTBG, "REG - LINEAR POS ADJ 3A BIAS - 10-VFDFN", Current Rating=3A, Manufacturer #1="ON Semiconductor", Manufacturer #2=-, Package=10-VFDFN, Power Max=10.8W, Supplier Part Number 1=NCP59744MN1ADJTBGOSCT-ND, Temperature="-40°C ~ 125°C (TJ)", Voltage Rating="(Vout+VDO) ~ 5.5V", Assembly Type=SMD, CreatedBy/Date="Raphael Bouchard / 2019-06-07", Cryo=UNKNOWN, GRAMS Lib Spec=2.8, HelpURL=https://www.onsemi.com/pub/Collateral/NCP59744-D.PDF, Magnetic Material=Unknown, Note=-, Part Number #1=NCP59744MN1ADJTBG, Part Number #2=-, Polarized=Yes, Supplier 1=Digi-Key, Tolerance=-, VerifiedBy="C.Paulin - 13/06/2019"
U12: "Linear Voltage Regulator IC Positive Adjustable 1 Output 1A 10-TDFN (3x3)", Package="TDFN-EP-10 Maxim", Check_prices=https://www.snapeda.com/parts/MAX15027ATB+T/Maxim+Integrated/view-part/?ref=eda, MF="Maxim Integrated Products", MP=MAX15027ATB+T, SnapEDA_Link=https://www.snapeda.com/parts/MAX15027ATB+T/Maxim+Integrated/view-part/?ref=snap
U13: library part FPGA_XC6SLX100-3FGG676C, "FPGA - XILINX SPARTAN 6 480 I/O - BGA-676", Package=BGA-676, Supplier Part Number 1=122-1760-ND, Temperature="0°C ~ 85°C (TJ)", Voltage="1.14 V ~ 1.26 V", CreatedBy="Jonathan Bouchard", HelpURL=https://www.xilinx.com/support/documentation/data_sheets/ds162.pdf, Mfg=Xilinx, Mfg Part Number=XC6SLX100-3FGG676C, Supplier 1=Digikey
U14: library part TIM_CDCE62005RGZT, "TIM - CLK SYNTH JITTER CLEANER 3:5 - QFN-48", Package=QFN-48, Supplier Part Number 1=296-23947-1-ND, Temperature="-40°C ~ 85°C", Voltage="3 V ~ 3.6 V", CreatedBy="Jonathan Bouchard", HelpURL=http://www.ti.com/lit/ds/symlink/cdce62005.pdf, Mfg="Texas Instruments", Mfg Part Number=CDCE62005RGZT, Supplier 1=Digikey
U15: library part COM_ETH_PHY_KSZ8091MNXCA, "COM - ETHERNET PHY 10/100 - QFN-32", Package=QFN-32, Supplier Part Number 1=576-4356-ND, Temperature="0°C ~ 70°C", Voltage="1.8V, 2.5V, 3.3V", CreatedBy="Jonathan Bouchard", HelpURL=http://ww1.microchip.com/downloads/en/DeviceDoc/00002275A.pdf, Mfg=Micrel, Mfg Part Number=KSZ8091MNXCA, Supplier 1=Digikey
U16: library part "MEM_DDR3_MT41J128M16JT-125:K TR", "MEM - DDR3 SDRAM 2GBIT 800MHZ - TFBGA-96", Package=TFBGA-96, Supplier Part Number 1=557-1611-1-ND, Temperature="0°C ~ 95°C (TC)", Voltage="1.425 V ~ 1.575 V", CreatedBy="Jonathan Bouchard", HelpURL=http://www.micron.com/~/media/Documents/Products/Data%20Sheet/DRAM/DDR3/2Gb_DDR3_SDRAM.pdf, Mfg=Micrel, Mfg Part Number=MT41J128M16JT-125, Supplier 1=Digikey
U17 U18: library part SENS_TEMP_TC74A0-3.3VCTTR, "SENS - TEMPERATURE SENSOR I2C/SMBUS - SOT23-5", Package=SOT23-5, Supplier Part Number 1=TC74A0-3.3VCTDKR-ND, Temperature="-40°C ~ 125°C", Voltage="2.7 V ~ 5.5 V", CreatedBy="Jonathan Bouchard", HelpURL=http://ww1.microchip.com/downloads/en/DeviceDoc/21462D.pdf, Mfg=Microchip, Mfg Part Number=TC74A0-3.3VCTTR, Precision="±2°C (±3°C)", Supplier 1=Digikey
U19: library part POW_MOTOR_DRV8811PWPR, "POW - STEPPER MOTOR DRIVER - SOP-28", Package=SOP-28, Supplier Part Number 1=296-24591-1-ND, Temperature="-40°C ~ 150°C (TJ)", Voltage="3 V ~ 5.5 V / 8 V ~ 38 V", CreatedBy="Jonathan Bouchard", HelpURL=http://www.ti.com/lit/ds/symlink/drv8811.pdf, Mfg="Texas Instrument", Mfg Part Number=DRV8811PWPR, Supplier 1=Digikey
U20: "Description", Manufacturer_Name=Macronix, Copyright="Copyright (C) 2025 Ultra Librarian. All rights reserved.", Manufacturer_Part_Number=MX25L3206EM2I-12G, RefDes=RefDes, Type=Type
U21: library part ADC_ADS62P48IRGCT, "ADC - 14 BIT 210MSPS SUAL - VQFN-64", Package=VQFN-64, Supplier Part Number 1=296-24611-1-ND, Temperature="-40°C ~ 85°C", Voltage="3.15 V ~ 3.6 V / 1.7 V ~ 1.9 V", CreatedBy="Jonathan Bouchard", HelpURL=http://www.ti.com/lit/ds/symlink/ads62p48.pdf, Mfg="Texas Instruments", Mfg Part Number=ADS62P48IRGCT, Precision="14 Bit", Supplier 1=Digikey
U22: library part OPAMP_ADA4927-2YCPZ-R2, "OPAMP - CFA 2.3GHZ - QFN-24", Current=65mA, Package=QFN-24, Supplier Part Number 1=ADA4927-2YCPZ-R2CT-ND, Temperature="-40°C ~ 105°C", Voltage="4.5 V ~ 11 V, ±2.25 V ~ 5.5 V", CreatedBy="Jonathan Bouchard", HelpURL=http://www.analog.com/media/en/technical-documentation/data-sheets/ADA4927-1_4927-2.pdf, Mfg="Analog Devices", Mfg Part Number=ADA4927-2YCPZ-R2, Supplier 1=Digikey
U23: library part DAC_AD9146BCPZ, "DAC - 16BIT SRL HIGH SPEED - QFN-48", Package=QFN-48, Supplier Part Number 1=AD9146BCPZ-ND, Temperature="-40°C ~ 85°C", Voltage="3.13 V ~ 3.47 V / 1.71 V ~ 1.89 V", CreatedBy="Jonathan Bouchard", HelpURL=http://www.analog.com/media/en/technical-documentation/data-sheets/AD9146.PDF, Mfg="Analog Devices Inc.", Mfg Part Number=AD9146BCPZ, Precision="16 Bit", Supplier 1=Digikey
U24: library part OPAMP_AD8056ARMZ, "OPAMP - VFB 300MHZ - 8MSOP", Current=60mA, Package=MSOP-8, Supplier Part Number 1=AD8056ARMZ-REEL7CT-ND, Temperature="-40°C ~ 125°C", Voltage="8 V ~ 12 V, ±4 V ~ 6 V", CreatedBy="Jonathan Bouchard", HelpURL=http://www.analog.com/media/en/technical-documentation/data-sheets/AD8055_8056.pdf, Mfg="Analog Devices", Mfg Part Number=AD8056ARMZ, Supplier 1=Digikey
U25: "Optoisolator Transistor Output 3750Vrms 1 Channel 4-SSOP", Package="SSOP-4 Everlight", Check_prices=https://www.snapeda.com/parts/EL3H7(TA)-VG/Everlight/view-part/?ref=eda, MF="Everlight Electronics", MP=EL3H7(TA)-VG, SnapEDA_Link=https://www.snapeda.com/parts/EL3H7(TA)-VG/Everlight/view-part/?ref=snap
Y1: library part OSC_590BD-BDG, "TIM - OSC PROG 125MHz ~ 214.999MHz LVDS 3.3V 7PPM EN/DS - 6-SMD", Current Rating="100 mA (supply)", Manufacturer #1="Silicon Labs", Package=6-SMD, Supplier Part Number 1=590BD-BDG-ND, Temperature="-40°C ~ 85°C", Voltage Rating="3.3V (supply)", Assembly Type=SMD, CreatedBy/Date="from 590BD-CDG", Cryo=UNKNOWN, GRAMS Lib Spec=2.8, HelpURL=https://www.silabs.com/documents/public/data-sheets/Si590-591.pdf, Magnetic Material=UNKNOWN, Note="Spécifié la fréquence lors de la commande", Part Number #1=590BD-BDG, Polarized=Yes, Supplier 1=Digi-Key, VerifiedBy="Caroline Paulin / 3/10/2019"
Y2: library part OSC_ASDMB-25.000MHZ-LC-T, "OSC - 25MHz XO (Standard) LVCMOS - 4-SMD, No Lead", Manufacturer #1="Abracon LLC", Package="4-SMD, No Lead", Supplier Part Number 1=535-11730-1-ND, Temperature="-40°C ~ +85°C", Tolerance=±50ppm, Voltage Rating="1.8V ~ 3.3V", Assembly Type=SMD, CreatedBy/Date="Joël Lemay 2019-03-29", Cryo=UNKNOWN, GRAMS Lib Spec=2.8, HelpURL=https://abracon.com/Oscillators/ASDMB.pdf, Magnetic Material=Unknown, Part Number #1=ASDMB-25.000MHZ-LC-T, Polarized=Yes, Supplier 1=Digi-Key, VerifiedBy="C. Paulin - 29 mai 2019"

## Via types
v1: diameter 19.68, hole 7.87, Top Layer to Bottom, 106 vias
v2: diameter 20, hole 10, Top Layer to Bottom, 78 vias
v3: diameter 15.75, hole 7.87, Top Layer to Bottom, 30 vias
v4: diameter 22, hole 12, Top Layer to Bottom, 9 vias
v5: diameter 19.68, hole 11.81, Top Layer to Bottom, 9 vias

## Nets (pads, with @x,y where several pads share a name; then routed paths per layer and width w, separated by ;. In a path a pad name is that pad's centre, name@x,y a point inside that pad or via, vN(x,y) a via of type N, cw(c..) or ccw(c..) an arc to the next point about the centre after c; other vN are vias at no path point)
1V2: C15.2 C16.2 C17.1 R9.2 TP4.1 U4.7
1V2D: C72.2 C73.2 C74.2 C75.2 C76.2 C77.2 C78.2 C125.2 C126.2 U13.K11 U13.K17 U13.L10 U13.L12 U13.L14 U13.L16 U13.M11 U13.M13 U13.M15 U13.N12 U13.N14 U13.N16 U13.P11 U13.P13 U13.P15 U13.R12 U13.R14 U13.R16 U13.T11 U13.T13 U13.T15 U13.T17 U13.U10 U13.U16 U15.2
1V5D: C131.2 C132.2 C133.2 C134.2 C135.2 C136.2 C137.2 C138.2 C139.2 R40.2 U13.AC6 U13.AD2 U13.M7 U13.P4 U13.P9 U13.T2 U13.T7 U13.W4 U13.W6 U13.Y2 U16.A1 U16.A8 U16.B2 U16.C1 U16.C9 U16.D2 U16.D9 U16.E9 U16.F1 U16.G7 U16.H2 U16.H9 U16.K2 U16.K8 U16.N1 U16.N9 U16.R1 U16.R9
1V8: C34.2 C39.2 R19.2 R23.2 TP10.1 TP11.1 U10.9 U10.10 U11.9 U11.10
1V8D: C179.2 C180.2 C181.2 C182.2 C183.2 C184.2 C185.2 C186.2 C187.2 C188.2 C189.2 C190.2 C191.2 C202.2 C203.2 C204.2 C205.2 C206.2 C207.2 C216.2 C217.2 C219.2 C220.2 C221.2 C222.2 C223.2 C224.2 U21.1 U21.38 U21.48 U21.58 U23.1 U23.2 U23.8 U23.29 U23.35
3V3: C237.2 C238.2 C239.2 C240.2 C241.2 C242.2 Y2.4
3V3A: C97.2 L2.2 L7.2 L12.2 L17.2
3V3A_PLL: C98.2 C99.2 C100.2 C101.2 C103.2 C104.2 C105.2 C106.2 C108.2 C109.2 C110.2 C111.2 C113.2 C114.2 C115.2 C116.2 C118.2 C119.2 C120.2 C121.2 L2.1 U14.1 U14.5 U14.34 U14.35 U14.39 U14.42 U14.47